# Altium PCB PCB_ESP32.PcbDoc (part 2 of 3)
Units mil, origin at the board's own origin, x right, y up, seen from the top; angles counter-clockwise.
Board outline 2700 x 1000 mil, 4 copper layers (L1, L2, L3, L4), stack 61.583 mil thick; 64 components, 73 nets, 299 pads, 161 vias.
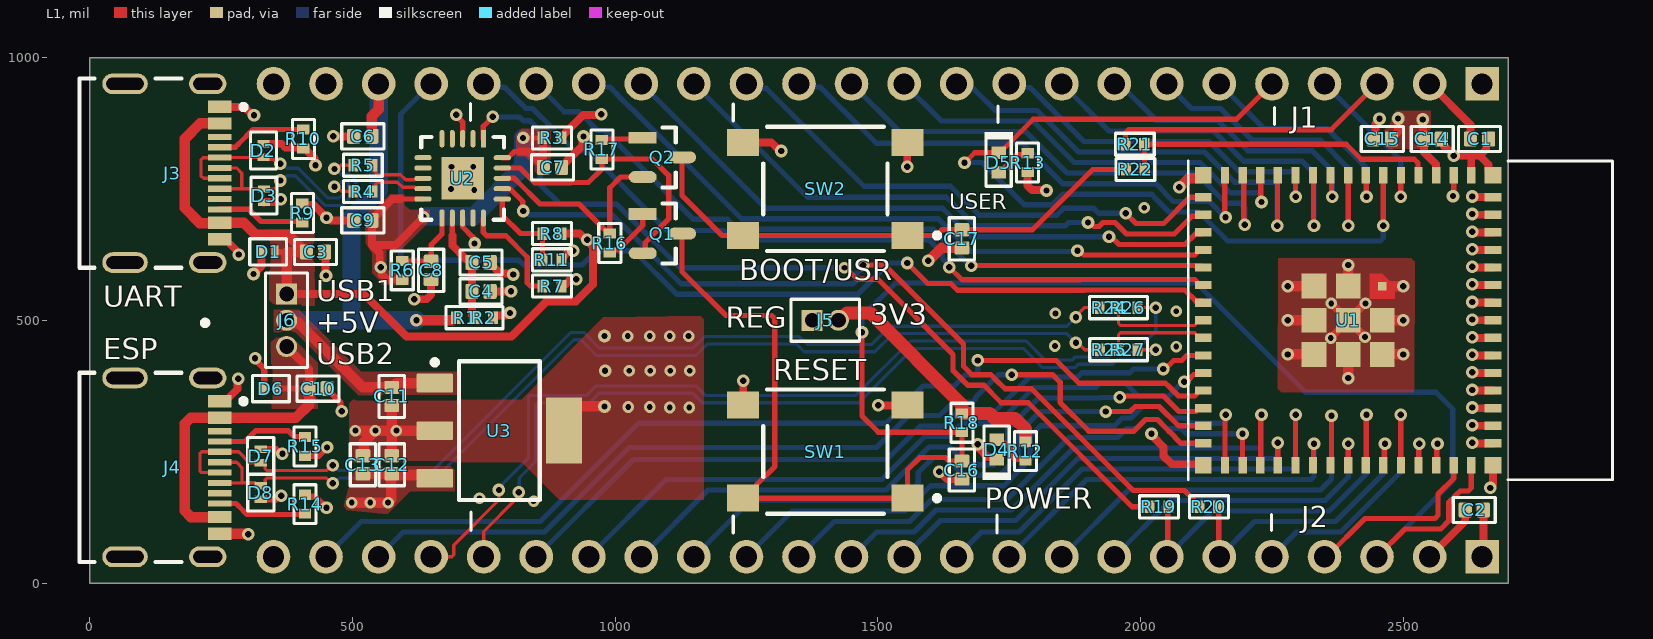
[diagram p0: L1 view]

## Part data (continued)
R4 R5 R21 R22: library part RC0402FR-0727RL, "RES 27 OHM 1% 1/16W 0402", Case Code (Imperial)=0402, Case Code (Metric)=1005, LCSC Part Number=C138021, Manufacturer="Yageo Group", Max Operating Temperature=155°C, Max Power Dissipation=63mW, Min Operating Temperature=-55°C, Power Dissipation=62.5mW, Supplier Part Number=YAG3086DKR-ND, Temperature Coefficient=100ppm/°C, Tolerance=1%, Voltage Rating=50V, Case/Package=0402, Category="Chip SMD Resistors", China RoHS=Non-Compliant, ComponentLink1Description=https://datasheet.octopart.com:443/RC0402FR-0727RL-Yageo-datasheet-175887523.pdf?src-supplier=Newark, ComponentLink1URL=https://datasheet.octopart.com:443/RC0402FR-0727RL-Yageo-datasheet-175887523.pdf?src-supplier=Newark, ComponentLink2Description=https://datasheet.octopart.com:443/RC0402FR-0727RL-Yageo-datasheet-8324527.pdf?src-supplier=Newark, ComponentLink2URL=https://datasheet.octopart.com:443/RC0402FR-0727RL-Yageo-datasheet-8324527.pdf?src-supplier=Newark, ComponentLink3Description=https://datasheet.octopart.com:443/RC0402FR-0727RL-Yageo-datasheet-103092701.pdf?src-supplier=Upverter, ComponentLink3URL=https://datasheet.octopart.com:443/RC0402FR-0727RL-Yageo-datasheet-103092701.pdf?src-supplier=Upverter, ComponentLink4Description=https://datasheet.octopart.com:443/RC0402FR-0727RL-Yageo-datasheet-10408619.pdf?src-supplier=element14+APAC, ComponentLink4URL=https://datasheet.octopart.com:443/RC0402FR-0727RL-Yageo-datasheet-10408619.pdf?src-supplier=element14+APAC, ComponentLink5Description=https://datasheet.octopart.com:443/RC0402FR-0727RL-Yageo-datasheet-62067350.pdf?src-supplier=element14+APAC, ComponentLink5URL=https://datasheet.octopart.com:443/RC0402FR-0727RL-Yageo-datasheet-62067350.pdf?src-supplier=element14+APAC, ComponentLink6Description=https://datasheet.octopart.com:443/RC0402FR-0727RL-Yageo-datasheet-175423674.pdf?src-supplier=SOS+electronic, ComponentLink6URL=https://datasheet.octopart.com:443/RC0402FR-0727RL-Yageo-datasheet-175423674.pdf?src-supplier=SOS+electronic, ComponentLink7Description=https://datasheet.octopart.com:443/RC0402FR-0727RL-Yageo-datasheet-8329306.pdf?src-supplier=SOS+electronic, ComponentLink7URL=https://datasheet.octopart.com:443/RC0402FR-0727RL-Yageo-datasheet-8329306.pdf?src-supplier=SOS+electronic, ComponentLink8Description=https://datasheet.octopart.com:443/RC0402FR-0727RL-Yageo-datasheet-164759695.pdf?src-supplier=Future+Electronics, ComponentLink8URL=https://datasheet.octopart.com:443/RC0402FR-0727RL-Yageo-datasheet-164759695.pdf?src-supplier=Future+Electronics, ComponentLink9Description=https://datasheet.octopart.com:443/RC0402FR-0727RL-Yageo-datasheet-137700087.pdf?src-supplier=Future+Electronics, ComponentLink9URL=https://datasheet.octopart.com:443/RC0402FR-0727RL-Yageo-datasheet-137700087.pdf?src-supplier=Future+Electronics, ComponentLink10Description=https://datasheet.octopart.com:443/RC0402FR-0727RL-Yageo-datasheet-12531192.pdf?src-supplier=Future+Electronics, ComponentLink10URL=https://datasheet.octopart.com:443/RC0402FR-0727RL-Yageo-datasheet-12531192.pdf?src-supplier=Future+Electronics, ComponentLink11Description=https://datasheet.octopart.com:443/RC0402FR-0727RL-Yageo-datasheet-148775077.pdf?src-supplier=TME, ComponentLink11URL=https://datasheet.octopart.com:443/RC0402FR-0727RL-Yageo-datasheet-148775077.pdf?src-supplier=TME, ComponentLink12Description=https://datasheet.octopart.com/RC0402FR-0727RL-Yageo-datasheet-73766026.pdf, ComponentLink12URL=https://datasheet.octopart.com/RC0402FR-0727RL-Yageo-datasheet-73766026.pdf, ComponentLink13Description=http://sigma.octopart.com:80/rohs_statement/Yageo-company-2.pdf?src-supplier=Compliance+Statements, ComponentLink13URL=http://sigma.octopart.com:80/rohs_statement/Yageo-company-2.pdf?src-supplier=Compliance+Statements, ComponentLink14Description=http://sigma.octopart.com:80/conflict_mineral_statement/Yageo-company-3.pdf?src-supplier=Compliance+Statements, ComponentLink14URL=http://sigma.octopart.com:80/conflict_mineral_statement/Yageo-company-3.pdf?src-supplier=Compliance+Statements, Composition="Thick Film", Depth=500µm, Features="Moisture Resistant", Height=350µm, Lead Free="Lead Free", Length=1mm, Lifecycle Status=Production, Manufacturer Part Number=RC0402FR-0727RL, Military Standard=Not, Mounting Technology="Surface Mount", Number of Terminals=2, Number of Terminations=2, Pins=2, Power Rating=63mW, Pricing="1=0.1, 10=0.007, 25=0.0068, 50=0.0062, 100=0.0051, 250=0.00308 (USD)", REACH SVHC=Yes, RoHS=Compliant, Schedule B="8533210045, 8533210045|8533210045, 8533210045|8533210045|8533210045, 8533210045|8533210045|8533210045|8533210045", Stock=336674, Supplier=DigiKey, Termination=SMD/SMT, Voltage Rating (AC)=50V, Voltage Rating (DC)=50V, Weight=652.039032µg, Width=500µm, Working Voltage=50V
R7 R11 R16 R17 R18: library part RC0402FR-0710KL, "RES 10K OHM 1% 1/16W 0402", Case Code (Imperial)=0402, LCSC Part Number=C60490, Manufacturer="Yageo Group", Max Operating Temperature=155°C, Min Operating Temperature=-55°C, Power Dissipation=62.5mW, Power Rating=63mW, Supplier Part Number=311-10.0KLRCT-ND, Temperature Coefficient=100ppm/°C, Tolerance=1%, Voltage Rating=50V, Case Code (Metric)=0402, Case/Package=0402, Category="Chip SMD Resistors", China RoHS=Non-Compliant, ComponentLink1Description=https://datasheet.octopart.com:443/RC0402FR-0710KL-Yageo-datasheet-175887523.pdf?src-supplier=Newark, ComponentLink1URL=https://datasheet.octopart.com:443/RC0402FR-0710KL-Yageo-datasheet-175887523.pdf?src-supplier=Newark, ComponentLink2Description=https://datasheet.octopart.com:443/RC0402FR-0710KL-Yageo-datasheet-12531192.pdf?src-supplier=Newark, ComponentLink2URL=https://datasheet.octopart.com:443/RC0402FR-0710KL-Yageo-datasheet-12531192.pdf?src-supplier=Newark, ComponentLink3Description=https://datasheet.octopart.com:443/RC0402FR-0710KL-Yageo-datasheet-8324527.pdf?src-supplier=Newark, ComponentLink3URL=https://datasheet.octopart.com:443/RC0402FR-0710KL-Yageo-datasheet-8324527.pdf?src-supplier=Newark, ComponentLink4Description=https://datasheet.octopart.com:443/RC0402FR-0710KL-Yageo-datasheet-10408619.pdf?src-supplier=element14+APAC, ComponentLink4URL=https://datasheet.octopart.com:443/RC0402FR-0710KL-Yageo-datasheet-10408619.pdf?src-supplier=element14+APAC, ComponentLink5Description=https://datasheet.octopart.com:443/RC0402FR-0710KL-Yageo-datasheet-62067350.pdf?src-supplier=element14+APAC, ComponentLink5URL=https://datasheet.octopart.com:443/RC0402FR-0710KL-Yageo-datasheet-62067350.pdf?src-supplier=element14+APAC, ComponentLink6Description=https://datasheet.octopart.com:443/RC0402FR-0710KL-Yageo-datasheet-21426659.pdf?src-supplier=element14+APAC, ComponentLink6URL=https://datasheet.octopart.com:443/RC0402FR-0710KL-Yageo-datasheet-21426659.pdf?src-supplier=element14+APAC, ComponentLink7Description=https://datasheet.octopart.com:443/RC0402FR-0710KL-Yageo-datasheet-164759695.pdf?src-supplier=Upverter, ComponentLink7URL=https://datasheet.octopart.com:443/RC0402FR-0710KL-Yageo-datasheet-164759695.pdf?src-supplier=Upverter, ComponentLink8Description=https://datasheet.octopart.com:443/RC0402FR-0710KL-Yageo-datasheet-103092701.pdf?src-supplier=Upverter, ComponentLink8URL=https://datasheet.octopart.com:443/RC0402FR-0710KL-Yageo-datasheet-103092701.pdf?src-supplier=Upverter, ComponentLink9Description=https://sigma.octopart.com:443/138820526/technical_drawing/Yageo-RC0402FR-0710KL.pdf?src-supplier=Upverter, ComponentLink9URL=https://sigma.octopart.com:443/138820526/technical_drawing/Yageo-RC0402FR-0710KL.pdf?src-supplier=Upverter, ComponentLink10Description=https://datasheet.octopart.com:443/RC0402FR-0710KL-Yageo-datasheet-98239111.pdf?src-supplier=Upverter, ComponentLink10URL=https://datasheet.octopart.com:443/RC0402FR-0710KL-Yageo-datasheet-98239111.pdf?src-supplier=Upverter, ComponentLink11Description=https://datasheet.octopart.com:443/RC0402FR-0710KL-Yageo-datasheet-68298067.pdf?src-supplier=Upverter, ComponentLink11URL=https://datasheet.octopart.com:443/RC0402FR-0710KL-Yageo-datasheet-68298067.pdf?src-supplier=Upverter, ComponentLink12Description=https://datasheet.octopart.com:443/RC0402FR-0710KL-Yageo-datasheet-68297981.pdf?src-supplier=Upverter, ComponentLink12URL=https://datasheet.octopart.com:443/RC0402FR-0710KL-Yageo-datasheet-68297981.pdf?src-supplier=Upverter, ComponentLink13Description=https://datasheet.octopart.com:443/RC0402FR-0710KL-Yageo-datasheet-141435361.pdf?src-supplier=Upverter, ComponentLink13URL=https://datasheet.octopart.com:443/RC0402FR-0710KL-Yageo-datasheet-141435361.pdf?src-supplier=Upverter, ComponentLink14Description=https://datasheet.octopart.com:443/RC0402FR-0710KL-Yageo-datasheet-12509768.pdf?src-supplier=Upverter, ComponentLink14URL=https://datasheet.octopart.com:443/RC0402FR-0710KL-Yageo-datasheet-12509768.pdf?src-supplier=Upverter, ComponentLink15Description=https://datasheet.octopart.com:443/RC0402FR-0710KL-Yageo-datasheet-8329306.pdf?src-supplier=element14, ComponentLink15URL=https://datasheet.octopart.com:443/RC0402FR-0710KL-Yageo-datasheet-8329306.pdf?src-supplier=element14, ComponentLink16Description=https://datasheet.octopart.com:443/RC0402FR-0710KL-Yageo-datasheet-505231.pdf?src-supplier=element14, ComponentLink16URL=https://datasheet.octopart.com:443/RC0402FR-0710KL-Yageo-datasheet-505231.pdf?src-supplier=element14, ComponentLink17Description=https://datasheet.octopart.com:443/RC0402FR-0710KL-Yageo-datasheet-175423674.pdf?src-supplier=SOS+electronic, ComponentLink17URL=https://datasheet.octopart.com:443/RC0402FR-0710KL-Yageo-datasheet-175423674.pdf?src-supplier=SOS+electronic, ComponentLink18Description=https://datasheet.octopart.com:443/RC0402FR-0710KL-Yageo-datasheet-137700087.pdf?src-supplier=Future+Electronics, ComponentLink18URL=https://datasheet.octopart.com:443/RC0402FR-0710KL-Yageo-datasheet-137700087.pdf?src-supplier=Future+Electronics, ComponentLink19Description=https://datasheet.octopart.com:443/RC0402FR-0710KL-Yageo-datasheet-8324255.pdf?src-supplier=Future+Electronics, ComponentLink19URL=https://datasheet.octopart.com:443/RC0402FR-0710KL-Yageo-datasheet-8324255.pdf?src-supplier=Future+Electronics, ComponentLink20Description=https://datasheet.octopart.com:443/RC0402FR-0710KL-Yageo-datasheet-79472498.pdf?src-supplier=Megastar, ComponentLink20URL=https://datasheet.octopart.com:443/RC0402FR-0710KL-Yageo-datasheet-79472498.pdf?src-supplier=Megastar, ComponentLink21Description=https://datasheet.octopart.com/RC0402FR-0710KL-Yageo-datasheet-73766026.pdf, ComponentLink21URL=https://datasheet.octopart.com/RC0402FR-0710KL-Yageo-datasheet-73766026.pdf, ComponentLink22Description=http://sigma.octopart.com:80/rohs_statement/Yageo-company-2.pdf?src-supplier=Compliance+Statements, ComponentLink22URL=http://sigma.octopart.com:80/rohs_statement/Yageo-company-2.pdf?src-supplier=Compliance+Statements, ComponentLink23Description=http://sigma.octopart.com:80/conflict_mineral_statement/Yageo-company-3.pdf?src-supplier=Compliance+Statements, ComponentLink23URL=http://sigma.octopart.com:80/conflict_mineral_statement/Yageo-company-3.pdf?src-supplier=Compliance+Statements, Composition="Thick Film", Depth=500µm, Height=350µm, Lead Free="Lead Free", Lead Pitch=200µm, Length=1mm, Lifecycle Status=Production, Manufacturer Part Number=RC0402FR-0710KL, Military Standard=Not, Mounting Technology="Surface Mount", Number of Terminals=2, Number of Terminations=2, Packaging="Tape & Reel", Pins=2, Pricing="1=0.11, 10=0.011, 25=0.010, 50=0.0092, 100=0.0071, 250=0.00308, 10000=0.00286, 20000=0.00253, 30000=0.00237, 50000=0.0022, 70000=0.0021, 100000=0.002, 120000=0.00196, 240000=0.00182, 250000=0.00181 (USD)", REACH SVHC=Yes, RoHS=Compliant, Schedule B="8533210045, 8533210045|8533210045|8533210045|8533210045|8533210045|8533210045|8533210045|8533210045|8533210045|8533210045|8533210045|8533210045|8533210045|8533210045, 8533210045|8533210045|8533210045|8533210045|8533210045|8533210045|8533210045|8533210045|8533210045|8533210045|8533210045|8533210045|8533210045|8533210045|8533210045, 8533210045|8533210045|8533210045|8533210045|8533210045|8533210045|8533210045|8533210045|8533210045|8533210045|8533210045|8533210045|8533210045|8533210045|8533210045|8533210045", Stock=10693324, Supplier=DigiKey, Termination=SMD/SMT, Voltage Rating (DC)=50V, Width=500µm, Working Voltage=50V
R8: library part RC0402FR-074K7L, "RES 4.7K OHM 1% 1/16W 0402", Case Code (Imperial)=0402, Case Code (Metric)=1005, LCSC Part Number=C105871, Manufacturer="Yageo Group", Max Operating Temperature=155°C, Min Operating Temperature=-55°C, Power Dissipation=62.5mW, Power Rating=63mW, Supplier Part Number=311-4.7KLRCT-ND, Temperature Coefficient=100ppm/°C, Tolerance=1%, Voltage Rating=50V, Case/Package=0402, Category="Chip SMD Resistors", China RoHS=Non-Compliant, ComponentLink1Description=https://datasheet.octopart.com:443/RC0402FR-074K7L-Yageo-datasheet-175887523.pdf?src-supplier=IHS, ComponentLink1URL=https://datasheet.octopart.com:443/RC0402FR-074K7L-Yageo-datasheet-175887523.pdf?src-supplier=IHS, ComponentLink2Description=https://datasheet.octopart.com:443/RC0402FR-074K7L-Yageo-datasheet-103092701.pdf?src-supplier=Upverter, ComponentLink2URL=https://datasheet.octopart.com:443/RC0402FR-074K7L-Yageo-datasheet-103092701.pdf?src-supplier=Upverter, ComponentLink3Description=https://datasheet.octopart.com:443/RC0402FR-074K7L-Yageo-datasheet-98239111.pdf?src-supplier=Upverter, ComponentLink3URL=https://datasheet.octopart.com:443/RC0402FR-074K7L-Yageo-datasheet-98239111.pdf?src-supplier=Upverter, ComponentLink4Description=https://datasheet.octopart.com:443/RC0402FR-074K7L-Yageo-datasheet-10408619.pdf?src-supplier=element14+APAC, ComponentLink4URL=https://datasheet.octopart.com:443/RC0402FR-074K7L-Yageo-datasheet-10408619.pdf?src-supplier=element14+APAC, ComponentLink5Description=https://datasheet.octopart.com:443/RC0402FR-074K7L-Yageo-datasheet-13691069.pdf?src-supplier=element14+APAC, ComponentLink5URL=https://datasheet.octopart.com:443/RC0402FR-074K7L-Yageo-datasheet-13691069.pdf?src-supplier=element14+APAC, ComponentLink6Description=https://datasheet.octopart.com:443/RC0402FR-074K7L-Yageo-datasheet-12531192.pdf?src-supplier=Newark, ComponentLink6URL=https://datasheet.octopart.com:443/RC0402FR-074K7L-Yageo-datasheet-12531192.pdf?src-supplier=Newark, ComponentLink7Description=https://datasheet.octopart.com:443/RC0402FR-074K7L-Yageo-datasheet-8324527.pdf?src-supplier=Newark, ComponentLink7URL=https://datasheet.octopart.com:443/RC0402FR-074K7L-Yageo-datasheet-8324527.pdf?src-supplier=Newark, ComponentLink8Description=https://datasheet.octopart.com:443/RC0402FR-074K7L-Yageo-datasheet-62067350.pdf?src-supplier=Farnell, ComponentLink8URL=https://datasheet.octopart.com:443/RC0402FR-074K7L-Yageo-datasheet-62067350.pdf?src-supplier=Farnell, ComponentLink9Description=https://datasheet.octopart.com:443/RC0402FR-074K7L-Yageo-datasheet-8329306.pdf?src-supplier=element14, ComponentLink9URL=https://datasheet.octopart.com:443/RC0402FR-074K7L-Yageo-datasheet-8329306.pdf?src-supplier=element14, ComponentLink10Description=https://datasheet.octopart.com:443/RC0402FR-074K7L-Yageo-datasheet-175423674.pdf?src-supplier=SOS+electronic, ComponentLink10URL=https://datasheet.octopart.com:443/RC0402FR-074K7L-Yageo-datasheet-175423674.pdf?src-supplier=SOS+electronic, ComponentLink11Description=https://datasheet.octopart.com:443/RC0402FR-074K7L-Yageo-datasheet-164759695.pdf?src-supplier=Future+Electronics, ComponentLink11URL=https://datasheet.octopart.com:443/RC0402FR-074K7L-Yageo-datasheet-164759695.pdf?src-supplier=Future+Electronics, ComponentLink12Description=https://datasheet.octopart.com:443/RC0402FR-074K7L-Yageo-datasheet-137700087.pdf?src-supplier=Future+Electronics, ComponentLink12URL=https://datasheet.octopart.com:443/RC0402FR-074K7L-Yageo-datasheet-137700087.pdf?src-supplier=Future+Electronics, ComponentLink13Description=https://datasheet.octopart.com:443/RC0402FR-074K7L-Yageo-datasheet-79472498.pdf?src-supplier=Megastar, ComponentLink13URL=https://datasheet.octopart.com:443/RC0402FR-074K7L-Yageo-datasheet-79472498.pdf?src-supplier=Megastar, ComponentLink14Description=https://datasheet.octopart.com/RC0402FR-074K7L-Yageo-datasheet-73766026.pdf, ComponentLink14URL=https://datasheet.octopart.com/RC0402FR-074K7L-Yageo-datasheet-73766026.pdf, ComponentLink15Description=http://sigma.octopart.com:80/rohs_statement/Yageo-company-2.pdf?src-supplier=Compliance+Statements, ComponentLink15URL=http://sigma.octopart.com:80/rohs_statement/Yageo-company-2.pdf?src-supplier=Compliance+Statements, ComponentLink16Description=http://sigma.octopart.com:80/conflict_mineral_statement/Yageo-company-3.pdf?src-supplier=Compliance+Statements, ComponentLink16URL=http://sigma.octopart.com:80/conflict_mineral_statement/Yageo-company-3.pdf?src-supplier=Compliance+Statements, Composition="Thick Film", Depth=500µm, Height=350µm, Lead Free="Lead Free", Length=1mm, Lifecycle Status=Production, Manufacturer Part Number=RC0402FR-074K7L, Military Standard=Not, Mounting Technology="Surface Mount", Number of Terminals=2, Packaging="Tape & Reel", Pins=2, Pricing="1=0.1, 10=0.02, 25=0.014, 50=0.0112, 100=0.009, 250=0.00688, 500=0.00566, 1000=0.00474, 5000=0.00328 (USD)", REACH SVHC=Yes, RoHS=Compliant, Schedule B="8533210045, 8533210045|8533210045, 8533210045|8533210045|8533210045, 8533210045|8533210045|8533210045|8533210045", Stock=2042199, Supplier=DigiKey, Termination=SMD/SMT, Voltage Rating (AC)=50V, Voltage Rating (DC)=50V, Width=500µm, Working Voltage=50V
R9 R10 R14 R15: library part RC0402FR-07510KL, "RES 5.1K OHM 1% 1/16W 0402", Case Code (Imperial)=0402, LCSC Part Number=C105872, Manufacturer="Yageo Group", Max Operating Temperature=155°C, Max Power Dissipation=63mW, Min Operating Temperature=-55°C, Power Dissipation=62.5mW, Supplier Part Number=311-510KLRCT-ND, Temperature Coefficient=100ppm/°C, Tolerance=1%, Voltage Rating=50V, Case/Package=0402, Category="Chip SMD Resistors", China RoHS=Non-Compliant, ComponentLink1Description=https://datasheet.octopart.com:443/RC0402FR-07510KL-Yageo-datasheet-175887523.pdf?src-supplier=Newark, ComponentLink1URL=https://datasheet.octopart.com:443/RC0402FR-07510KL-Yageo-datasheet-175887523.pdf?src-supplier=Newark, ComponentLink2Description=https://datasheet.octopart.com:443/RC0402FR-07510KL-Yageo-datasheet-8324527.pdf?src-supplier=Newark, ComponentLink2URL=https://datasheet.octopart.com:443/RC0402FR-07510KL-Yageo-datasheet-8324527.pdf?src-supplier=Newark, ComponentLink3Description=https://datasheet.octopart.com:443/RC0402FR-07510KL-Yageo-datasheet-103092701.pdf?src-supplier=Upverter, ComponentLink3URL=https://datasheet.octopart.com:443/RC0402FR-07510KL-Yageo-datasheet-103092701.pdf?src-supplier=Upverter, ComponentLink4Description=https://datasheet.octopart.com:443/RC0402FR-07510KL-Yageo-datasheet-10408619.pdf?src-supplier=element14+APAC, ComponentLink4URL=https://datasheet.octopart.com:443/RC0402FR-07510KL-Yageo-datasheet-10408619.pdf?src-supplier=element14+APAC, ComponentLink5Description=https://datasheet.octopart.com:443/RC0402FR-07510KL-Yageo-datasheet-62067350.pdf?src-supplier=element14+APAC, ComponentLink5URL=https://datasheet.octopart.com:443/RC0402FR-07510KL-Yageo-datasheet-62067350.pdf?src-supplier=element14+APAC, ComponentLink6Description=https://datasheet.octopart.com:443/RC0402FR-07510KL-Yageo-datasheet-164759695.pdf?src-supplier=Future+Electronics, ComponentLink6URL=https://datasheet.octopart.com:443/RC0402FR-07510KL-Yageo-datasheet-164759695.pdf?src-supplier=Future+Electronics, ComponentLink7Description=https://datasheet.octopart.com:443/RC0402FR-07510KL-Yageo-datasheet-137700087.pdf?src-supplier=Future+Electronics, ComponentLink7URL=https://datasheet.octopart.com:443/RC0402FR-07510KL-Yageo-datasheet-137700087.pdf?src-supplier=Future+Electronics, ComponentLink8Description=https://datasheet.octopart.com:443/RC0402FR-07510KL-Yageo-datasheet-12531192.pdf?src-supplier=Future+Electronics, ComponentLink8URL=https://datasheet.octopart.com:443/RC0402FR-07510KL-Yageo-datasheet-12531192.pdf?src-supplier=Future+Electronics, ComponentLink9Description=https://datasheet.octopart.com:443/RC0402FR-07510KL-Yageo-datasheet-148775077.pdf?src-supplier=TME, ComponentLink9URL=https://datasheet.octopart.com:443/RC0402FR-07510KL-Yageo-datasheet-148775077.pdf?src-supplier=TME, ComponentLink10Description=https://datasheet.octopart.com/RC0402FR-07510KL-Yageo-datasheet-73766026.pdf, ComponentLink10URL=https://datasheet.octopart.com/RC0402FR-07510KL-Yageo-datasheet-73766026.pdf, ComponentLink11Description=http://sigma.octopart.com:80/rohs_statement/Yageo-company-2.pdf?src-supplier=Compliance+Statements, ComponentLink11URL=http://sigma.octopart.com:80/rohs_statement/Yageo-company-2.pdf?src-supplier=Compliance+Statements, ComponentLink12Description=http://sigma.octopart.com:80/conflict_mineral_statement/Yageo-company-3.pdf?src-supplier=Compliance+Statements, ComponentLink12URL=http://sigma.octopart.com:80/conflict_mineral_statement/Yageo-company-3.pdf?src-supplier=Compliance+Statements, Composition="Thick Film", Depth=500µm, Features="Moisture Resistant", Height=350µm, Lead Free="Lead Free", Length=1mm, Lifecycle Status=Production, Manufacturer Part Number=RC0402FR-07510KL, Military Standard=Not, Mounting Technology="Surface Mount", Number of Terminals=2, Number of Terminations=2, Packaging="Cut Tape", Pins=2, Power Rating=63mW, Pricing="1=0.1, 10=0.009, 25=0.0076, 50=0.0062, 100=0.0041, 250=0.00328 (USD)", REACH SVHC=Yes, RoHS=Compliant, Schedule B="8533210045, 8533210045|8533210045|8533210045|8533210045|8533210045", Stock=81482, Supplier=DigiKey, Termination=SMD/SMT, Voltage Rating (DC)=50V, Width=500µm, Working Voltage=50V
R12 R13: library part RC0402JR-071KL, "RES 1K OHM 5% 1/16W 0402", Case Code (Imperial)=0402, LCSC Part Number=C105637, Manufacturer="Yageo Group", Max Operating Temperature=155°C, Max Power Dissipation=63mW, Min Operating Temperature=-55°C, Power Dissipation=62.5mW, Supplier Part Number=311-1.0KJRCT-ND, Temperature Coefficient=100ppm/°C, Tolerance=5%, Voltage Rating=50V, Case/Package=0402, Category="Chip SMD Resistors", China RoHS=Non-Compliant, ComponentLink1Description=https://datasheet.octopart.com:443/RC0402JR-071KL-Yageo-datasheet-175887523.pdf?src-supplier=Farnell, ComponentLink1URL=https://datasheet.octopart.com:443/RC0402JR-071KL-Yageo-datasheet-175887523.pdf?src-supplier=Farnell, ComponentLink2Description=https://datasheet.octopart.com:443/RC0402JR-071KL-Yageo-datasheet-8324527.pdf?src-supplier=Farnell, ComponentLink2URL=https://datasheet.octopart.com:443/RC0402JR-071KL-Yageo-datasheet-8324527.pdf?src-supplier=Farnell, ComponentLink3Description=https://datasheet.octopart.com:443/RC0402JR-071KL-Yageo-datasheet-10408619.pdf?src-supplier=Newark, ComponentLink3URL=https://datasheet.octopart.com:443/RC0402JR-071KL-Yageo-datasheet-10408619.pdf?src-supplier=Newark, ComponentLink4Description=https://datasheet.octopart.com:443/RC0402JR-071KL-Yageo-datasheet-505231.pdf?src-supplier=Newark, ComponentLink4URL=https://datasheet.octopart.com:443/RC0402JR-071KL-Yageo-datasheet-505231.pdf?src-supplier=Newark, ComponentLink5Description=https://datasheet.octopart.com:443/RC0402JR-071KL-Yageo-datasheet-79472498.pdf?src-supplier=Upverter, ComponentLink5URL=https://datasheet.octopart.com:443/RC0402JR-071KL-Yageo-datasheet-79472498.pdf?src-supplier=Upverter, ComponentLink6Description=https://datasheet.octopart.com:443/RC0402JR-071KL-Yageo-datasheet-44585784.pdf?src-supplier=Upverter, ComponentLink6URL=https://datasheet.octopart.com:443/RC0402JR-071KL-Yageo-datasheet-44585784.pdf?src-supplier=Upverter, ComponentLink7Description=https://datasheet.octopart.com:443/RC0402JR-071KL-Yageo-datasheet-62067350.pdf?src-supplier=element14+APAC, ComponentLink7URL=https://datasheet.octopart.com:443/RC0402JR-071KL-Yageo-datasheet-62067350.pdf?src-supplier=element14+APAC, ComponentLink8Description=https://datasheet.octopart.com:443/RC0402JR-071KL-Yageo-datasheet-148775077.pdf?src-supplier=JRH+Electronics, ComponentLink8URL=https://datasheet.octopart.com:443/RC0402JR-071KL-Yageo-datasheet-148775077.pdf?src-supplier=JRH+Electronics, ComponentLink9Description=https://datasheet.octopart.com:443/RC0402JR-071KL-Yageo-datasheet-12531192.pdf?src-supplier=Seeed+Studio, ComponentLink9URL=https://datasheet.octopart.com:443/RC0402JR-071KL-Yageo-datasheet-12531192.pdf?src-supplier=Seeed+Studio, ComponentLink10Description=https://datasheet.octopart.com:443/RC0402JR-071KL-Yageo-datasheet-164759695.pdf?src-supplier=Future+Electronics, ComponentLink10URL=https://datasheet.octopart.com:443/RC0402JR-071KL-Yageo-datasheet-164759695.pdf?src-supplier=Future+Electronics, ComponentLink11Description=https://datasheet.octopart.com:443/RC0402JR-071KL-Yageo-datasheet-137700087.pdf?src-supplier=Future+Electronics, ComponentLink11URL=https://datasheet.octopart.com:443/RC0402JR-071KL-Yageo-datasheet-137700087.pdf?src-supplier=Future+Electronics, ComponentLink12Description=https://datasheet.octopart.com/RC0402JR-071KL-Yageo-datasheet-73766026.pdf, ComponentLink12URL=https://datasheet.octopart.com/RC0402JR-071KL-Yageo-datasheet-73766026.pdf, ComponentLink13Description=https://datasheet.octopart.com:443/RC0402JR-071KL-Yageo-datasheet-8329306.pdf?src-supplier=element14, ComponentLink13URL=https://datasheet.octopart.com:443/RC0402JR-071KL-Yageo-datasheet-8329306.pdf?src-supplier=element14, ComponentLink14Description=http://sigma.octopart.com:80/rohs_statement/Yageo-company-2.pdf?src-supplier=Compliance+Statements, ComponentLink14URL=http://sigma.octopart.com:80/rohs_statement/Yageo-company-2.pdf?src-supplier=Compliance+Statements, ComponentLink15Description=http://sigma.octopart.com:80/conflict_mineral_statement/Yageo-company-3.pdf?src-supplier=Compliance+Statements, ComponentLink15URL=http://sigma.octopart.com:80/conflict_mineral_statement/Yageo-company-3.pdf?src-supplier=Compliance+Statements, Composition="Thick Film", Depth=500µm, Features="Moisture Resistant", Height=350µm, Lead Free="Lead Free", Length=1mm, Lifecycle Status=Production, Manufacturer Part Number=RC0402JR-071KL, Military Standard=Not, Mounting Technology="Surface Mount", Number of Terminals=2, Number of Terminations=2, Packaging="Tape & Reel", Pins=2, Power Rating=62.5mW, Pricing="1=0.1, 10=0.006, 25=0.0052, 50=0.004, 100=0.0036, 250=0.00284 (USD)", REACH SVHC=Yes, RoHS=Compliant, Schedule B="8533210045, 8533210045|8533210045, 8533210045|8533210045|8533210045, 8533210045|8533210045|8533210045|8533210045", Stock=6533264, Supplier=DigiKey, Termination=SMD/SMT, Voltage Rating (AC)=50V, Voltage Rating (DC)=50V, Width=500µm, Working Voltage=50V
SW1 SW2: library part PTS645SM43SMTR92LFS, "SWITCH TACTILE SPST-NO 0.05A 12V", Case/Package=SMD/SMT, Color=Black, Contact Current Rating=50mA, Contact Resistance=100mΩ, Insulation Resistance=100GΩ, LCSC Part Number=C221877, Manufacturer="C&K Components", Max Operating Temperature=60°C, Max Voltage Rating (DC)=12V, Min Operating Temperature=-20°C, Operating Force=1.57N, Supplier Part Number=CKN9112CT-ND, Actuator Length=850µm, Actuator Material="Nylon, Polyamide", Category="Tactile Switches", ComponentLink1Description=https://datasheet.octopart.com:443/PTS645SM43SMTR92LFS-C%26K-Components-datasheet-169841344.pdf?src-supplier=Newark, ComponentLink1URL=https://datasheet.octopart.com:443/PTS645SM43SMTR92LFS-C%26K-Components-datasheet-169841344.pdf?src-supplier=Newark, ComponentLink2Description=https://datasheet.octopart.com:443/PTS645SM43SMTR92LFS-C%26K-Components-datasheet-41191814.pdf?src-supplier=Newark, ComponentLink2URL=https://datasheet.octopart.com:443/PTS645SM43SMTR92LFS-C%26K-Components-datasheet-41191814.pdf?src-supplier=Newark, ComponentLink3Description=https://datasheet.octopart.com:443/PTS645SM43SMTR92LFS-C%26K-Components-datasheet-67873720.pdf?src-supplier=Upverter, ComponentLink3URL=https://datasheet.octopart.com:443/PTS645SM43SMTR92LFS-C%26K-Components-datasheet-67873720.pdf?src-supplier=Upverter, ComponentLink4Description=https://datasheet.octopart.com:443/PTS645SM43SMTR92-LFS-C%26K-Components-datasheet-39117004.pdf?src-supplier=Upverter, ComponentLink4URL=https://datasheet.octopart.com:443/PTS645SM43SMTR92-LFS-C%26K-Components-datasheet-39117004.pdf?src-supplier=Upverter, ComponentLink5Description=https://datasheet.octopart.com:443/PTS645SM43SMTR92LFS-C%26K-Components-datasheet-165782998.pdf?src-supplier=Farnell, ComponentLink5URL=https://datasheet.octopart.com:443/PTS645SM43SMTR92LFS-C%26K-Components-datasheet-165782998.pdf?src-supplier=Farnell, ComponentLink6Description=https://datasheet.octopart.com:443/PTS645SM43SMTR92LFS-C%26K-Components-datasheet-110647872.pdf?src-supplier=TME, ComponentLink6URL=https://datasheet.octopart.com:443/PTS645SM43SMTR92LFS-C%26K-Components-datasheet-110647872.pdf?src-supplier=TME, ComponentLink7Description=https://datasheet.octopart.com:443/PTS645SM43SMTR92LFS-C%26K-Components-datasheet-24578962.pdf?src-supplier=Future+Electronics, ComponentLink7URL=https://datasheet.octopart.com:443/PTS645SM43SMTR92LFS-C%26K-Components-datasheet-24578962.pdf?src-supplier=Future+Electronics, ComponentLink8Description=https://datasheet.octopart.com:443/PTS645SM43SMTR92LFS-C%26K-Components-datasheet-138128951.pdf?src-supplier=Future+Electronics, ComponentLink8URL=https://datasheet.octopart.com:443/PTS645SM43SMTR92LFS-C%26K-Components-datasheet-138128951.pdf?src-supplier=Future+Electronics, ComponentLink9Description=https://datasheet.octopart.com:443/PTS645SM43SMTR92LFS-C%26K-Components-datasheet-62111174.pdf?src-supplier=Future+Electronics, ComponentLink9URL=https://datasheet.octopart.com:443/PTS645SM43SMTR92LFS-C%26K-Components-datasheet-62111174.pdf?src-supplier=Future+Electronics, ComponentLink10Description=https://datasheet.octopart.com:443/PTS645SM43SMTR92-LFS-C%26K-Components-datasheet-5331042.pdf?src-supplier=Future+Electronics, ComponentLink10URL=https://datasheet.octopart.com:443/PTS645SM43SMTR92-LFS-C%26K-Components-datasheet-5331042.pdf?src-supplier=Future+Electronics, ComponentLink11Description=https://datasheet.octopart.com:443/PTS645SM43SMTR92LFS-C%26K-Components-datasheet-62111384.pdf?src-supplier=Electro+Sonic, ComponentLink11URL=https://datasheet.octopart.com:443/PTS645SM43SMTR92LFS-C%26K-Components-datasheet-62111384.pdf?src-supplier=Electro+Sonic, ComponentLink12Description=https://datasheet.octopart.com:443/PTS645SM43SMTR92-LFS-C%26K-Components-datasheet-23707823.pdf?src-supplier=Electro+Sonic, ComponentLink12URL=https://datasheet.octopart.com:443/PTS645SM43SMTR92-LFS-C%26K-Components-datasheet-23707823.pdf?src-supplier=Electro+Sonic, ComponentLink13Description=https://datasheet.octopart.com:443/PTS645SM43SMTR92LFS-C%26K-Components-datasheet-44395798.pdf?src-supplier=Electro+Sonic, ComponentLink13URL=https://datasheet.octopart.com:443/PTS645SM43SMTR92LFS-C%26K-Components-datasheet-44395798.pdf?src-supplier=Electro+Sonic, ComponentLink14Description=http://sigma.octopart.com:80/reach_statement/ITT-company-18.pdf?src-supplier=Compliance+Statements, ComponentLink14URL=http://sigma.octopart.com:80/reach_statement/ITT-company-18.pdf?src-supplier=Compliance+Statements, Contact Material=Silver, Contact Plating=Silver, Current Rating=50mA, Depth=9mm, Electrical Life=100kcycles, Height=3.45mm, Illumination Type="Illuminated, Non-Illuminated", Lead Free="Lead Free", Length=6mm, Life (Cycles)=100kcycles, Lifecycle Status=Production, Manufacturer Package Identifier=PTS645SM43SMTR92LFS, Manufacturer Part Number=PTS645SM43SMTR92LFS, Max Current Rating=50mA, Mechanical Life=100kcycles, Mounting Technology="Surface Mount", Number of Positions=1, Orientation=Straight, Packaging="Cut Tape (CT)", Pricing="1=0.32, 10=0.275, 25=0.2576, 100=0.2307, 250=0.2138, 500=0.20176 (USD)", REACH SVHC=Yes, RoHS=Compliant, Stock=99095, Supplier=DigiKey, Switch Function=Off-Mom, Termination="Gull Wing", Throw Configuration=SPST, Voltage Rating (DC)=12V
U1: library part "ESP32-S3-MINI-1-N8 (2)", "20.5dBm ESP32-S3FN8 Chip 2.4GHz SMD WiFi Modules ROHS", LCSC Part Number=C2913206, Manufacturer="Espressif Systems", Supplier Part Number=5407-ESP32-S3-MINI-1-N8CT-ND, Category="RF Transceiver Modules and Modems", ComponentLink1Description=https://datasheet.octopart.com:443/ESP32-S3-MINI-1-N8-Espressif-Systems-datasheet-188867343.pdf?src-supplier=TME, ComponentLink1URL=https://datasheet.octopart.com:443/ESP32-S3-MINI-1-N8-Espressif-Systems-datasheet-188867343.pdf?src-supplier=TME, ComponentLink2Description=https://datasheet.octopart.com:443/ESP32-S3-MINI-1-N8-Espressif-Systems-datasheet-165560562.pdf?src-supplier=TME, ComponentLink2URL=https://datasheet.octopart.com:443/ESP32-S3-MINI-1-N8-Espressif-Systems-datasheet-165560562.pdf?src-supplier=TME, ComponentLink3Description=https://datasheet.octopart.com:443/ESP32-S3-MINI-1-N8-Espressif-Systems-datasheet-165560559.pdf?src-supplier=TME, ComponentLink3URL=https://datasheet.octopart.com:443/ESP32-S3-MINI-1-N8-Espressif-Systems-datasheet-165560559.pdf?src-supplier=TME, Manufacturer Part Number=ESP32-S3-MINI-1-N8, Pricing="1=5.28, 10=4.566, 25=4.3196, 100=3.9802, 250=3.7768 (USD)", RoHS=Compliant, Stock=5442, Supplier=DigiKey
U2: "IC USB SERIAL FULL UART 20QFN", Ambient Temperature Range High=85°C, Case/Package=QFN, Clock Frequency=12.02MHz, LCSC Part Number=C132159, Manufacturer=FTDI, Max Supply Current=8.4mA, Max Supply Voltage=5.5V, Min Operating Temperature=-40°C, Min Supply Voltage=2.97V, Operating Supply Current=8mA, Operating Supply Voltage=5V, Supplier Part Number=768-1128-6-ND, Category="Interface ICs", ComponentLink1Description=https://datasheet.octopart.com:443/FT231XQ-R-FTDI-datasheet-182343132.pdf?src-supplier=IHS, ComponentLink1URL=https://datasheet.octopart.com:443/FT231XQ-R-FTDI-datasheet-182343132.pdf?src-supplier=IHS, ComponentLink2Description=https://datasheet.octopart.com:443/FT231XQ-R-FTDI-datasheet-11021087.pdf?src-supplier=ODG+(Origin+Data+Global), ComponentLink2URL=https://datasheet.octopart.com:443/FT231XQ-R-FTDI-datasheet-11021087.pdf?src-supplier=ODG+(Origin+Data+Global), ComponentLink3Description=https://datasheet.octopart.com:443/FT231XQ-R-FTDI-datasheet-28834672.pdf?src-supplier=SOS+electronic, ComponentLink3URL=https://datasheet.octopart.com:443/FT231XQ-R-FTDI-datasheet-28834672.pdf?src-supplier=SOS+electronic, ComponentLink4Description=https://datasheet.octopart.com:443/FT231XQ-R-FTDI-datasheet-68321328.pdf?src-supplier=TME, ComponentLink4URL=https://datasheet.octopart.com:443/FT231XQ-R-FTDI-datasheet-68321328.pdf?src-supplier=TME, ComponentLink5Description=https://datasheet.octopart.com:443/FT231XQ-R-FTDI-datasheet-134530624.pdf?src-supplier=SHENGYU+ELECTRONICS, ComponentLink5URL=https://datasheet.octopart.com:443/FT231XQ-R-FTDI-datasheet-134530624.pdf?src-supplier=SHENGYU+ELECTRONICS, Data Rate=12Mbps, Height=800µm, Height - Seated (Max)=800µm, Interface="UART, USB", Lead Free="Lead Free", Length=4mm, Lifecycle Status=Production, Manufacturer Part Number=FT231XQ-R, Max Operating Temperature=85°C, Mounting Technology="Surface Mount", Number of Channels=1, Number of Terminals=20, Pins=20, Pricing="1=2.34, 25=2.27, 100=2.2, 250=2, 500=1.82002, 1000=1.7625 (USD)", REACH SVHC=Yes, RoHS=Compliant, Supplier=DigiKey, Terminal Pitch=500µm, Weight=123.008581mg, Width=4mm
U3: library part TL1963A-33DCYR, "IC REG LIN 3.3V 1.5A SOT-223-4", Case/Package=SOT-223, Dropout Voltage=340mV, Input Bias Current=1mA, LCSC Part Number=C181262, Manufacturer="Texas Instruments", Manufacturer Lifecycle Status=ACTIVE, Max Operating Temperature=125°C, Max Output current=1.5A, Max Output Voltage=3.3V, Max Supply Voltage=20V, Min Current Limit=1.6A, Min Input Voltage=2.1V, Min Operating Temperature=-40°C, Supplier Part Number=296-24897-1-ND, Accuracy=3%, Category="LDO Voltage Regulators", ComponentLink1Description=https://datasheet.octopart.com:443/TL1963A-33DCYR-Texas-Instruments-datasheet-36835243.pdf?src-supplier=Texas+Instruments, ComponentLink1URL=https://datasheet.octopart.com:443/TL1963A-33DCYR-Texas-Instruments-datasheet-36835243.pdf?src-supplier=Texas+Instruments, ComponentLink2Description=https://octopart.com:443/opatz8j6/c1?t=LPeIxNi9VIYhm4btPFesztQZr4Jwx4TEC9AzYIUzidleAjnLaCDg6djcfYgtEMksBP0b_W3HSBBkjLtdrfUn_yKeYr90VnZnmxw6arzA67Vmvq8kZVG4O0e60ARL7pAIxCU2reMQf8TBoAelotyVd-WlnWm22AyI_CO01BS-AvkILhbkAVk9waJFLfX5A7FtpEh2ahsW7Cg7jbdiX5maXLx2SysLFBPbu5IM2MS4K_ALs9Dlm3jTemRu7569Czv_q8HC2t3XPXHLUqWVYjMucOH6e4xWDqPFckp9BF6dznZ9HiDuEJm79JbQylyrwXBE7XZoj7nRDedoSKcsoIL3ZlqmwmuQ2-ckibvkVswyS9YtYxnRTimSPVhGH0uCwb9IPo2vqTs&src-supplier=Texas+Instruments, ComponentLink2URL=https://octopart.com:443/opatz8j6/c1?t=LPeIxNi9VIYhm4btPFesztQZr4Jwx4TEC9AzYIUzidleAjnLaCDg6djcfYgtEMksBP0b_W3HSBBkjLtdrfUn_yKeYr90VnZnmxw6arzA67Vmvq8kZVG4O0e60ARL7pAIxCU2reMQf8TBoAelotyVd-WlnWm22AyI_CO01BS-AvkILhbkAVk9waJFLfX5A7FtpEh2ahsW7Cg7jbdiX5maXLx2SysLFBPbu5IM2MS4K_ALs9Dlm3jTemRu7569Czv_q8HC2t3XPXHLUqWVYjMucOH6e4xWDqPFckp9BF6dznZ9HiDuEJm79JbQylyrwXBE7XZoj7nRDedoSKcsoIL3ZlqmwmuQ2-ckibvkVswyS9YtYxnRTimSPVhGH0uCwb9IPo2vqTs&src-supplier=Texas+Instruments, ComponentLink3Description=https://datasheet.octopart.com:443/TL1963A-33DCYR-Texas-Instruments-datasheet-10255270.pdf?src-supplier=Texas+Instruments, ComponentLink3URL=https://datasheet.octopart.com:443/TL1963A-33DCYR-Texas-Instruments-datasheet-10255270.pdf?src-supplier=Texas+Instruments, ComponentLink4Description=https://sigma.octopart.com:443/49253063/technical_drawing/Texas-Instruments-TL1963A-33DCYR.pdf?src-supplier=Texas+Instruments, ComponentLink4URL=https://sigma.octopart.com:443/49253063/technical_drawing/Texas-Instruments-TL1963A-33DCYR.pdf?src-supplier=Texas+Instruments, ComponentLink5Description=https://datasheet.octopart.com:443/TL1963A-33DCYR-Texas-Instruments-datasheet-159117591.pdf?src-supplier=Augswan, ComponentLink5URL=https://datasheet.octopart.com:443/TL1963A-33DCYR-Texas-Instruments-datasheet-159117591.pdf?src-supplier=Augswan, ComponentLink6Description=https://datasheet.octopart.com:443/TL1963A-33DCYR-Texas-Instruments-datasheet-21820479.pdf?src-supplier=Newark, ComponentLink6URL=https://datasheet.octopart.com:443/TL1963A-33DCYR-Texas-Instruments-datasheet-21820479.pdf?src-supplier=Newark, ComponentLink7Description=https://datasheet.octopart.com:443/TL1963A-33DCYR-Texas-Instruments-datasheet-16079880.pdf?src-supplier=Farnell, ComponentLink7URL=https://datasheet.octopart.com:443/TL1963A-33DCYR-Texas-Instruments-datasheet-16079880.pdf?src-supplier=Farnell, ComponentLink8Description=https://datasheet.octopart.com:443/TL1963A-33DCYR-Texas-Instruments-datasheet-14171511.pdf?src-supplier=iiiC, ComponentLink8URL=https://datasheet.octopart.com:443/TL1963A-33DCYR-Texas-Instruments-datasheet-14171511.pdf?src-supplier=iiiC, ComponentLink9Description=http://sigma.octopart.com:80/conflict_mineral_statement/Texas-Instruments-company-63.pdf?src-supplier=Compliance+Statements, ComponentLink9URL=http://sigma.octopart.com:80/conflict_mineral_statement/Texas-Instruments-company-63.pdf?src-supplier=Compliance+Statements, ComponentLink10Description=http://sigma.octopart.com:80/reach_statement/Texas-Instruments-company-64.pdf?src-supplier=Compliance+Statements, ComponentLink10URL=http://sigma.octopart.com:80/reach_statement/Texas-Instruments-company-64.pdf?src-supplier=Compliance+Statements, Contact Plating=Tin, Height=1.8mm, Lead Free="Lead Free", Length=6.5mm, Lifecycle Status=Production, Manufacturer Part Number=TL1963A-33DCYR, Min Output Voltage=3.3V, Nominal Output Voltage=3.3V, Number of Outputs=1, Number of Regulators=1, Output Current=1.5A, Output Type=Fixed, Output Voltage=3.3V, Pins=4, Polarity=Positive, Pricing="1=3.13, 10=2.344, 25=2.1476, 100=1.9323, 250=1.82956, 500=1.76766, 1000=1.71669 (USD)", Quiescent Current=1mA, Radiation Hardening=No, REACH SVHC=No, RoHS=Compliant, Schedule B="8542390000, 8542390000|8542390000|8542390000|8542390000|8542390000", Stock=5375, Supplier=DigiKey, Thickness=1.6mm, Width=3.5mm

## Via types
v1: diameter 24, hole 12, L1 to L4, tented both sides, 126 vias
v2: diameter 22, hole 11, L1 to L4, tented both sides, 35 vias

## Nets (pads, with @x,y where several pads share a name; then routed paths per layer and width w, separated by ;. In a path a pad name is that pad's centre, name@x,y a point inside that pad or via, vN(x,y) a via of type N, cw(c..) or ccw(c..) an arc to the next point about the centre after c; other vN are vias at no path point)
+3V3: C1.2 C2.2 C14.2 C15.2 J1.2 J2.1 J5.2 R2.1 R3.1 R12.2 R13.2 R18.2 U1.3 | length 4477.2
  L1 w15: R2.1@767.91,505 767.91,507.17 770.06,509.31 787.17,509.31 792.88,509.31 797.56,514 v1(800,514) ; R3.1@897.91,847 900.06,849.15 900.06,851.31 939.5,890.75 972.75,890.75 v1(974,892) ; R13.2@1785,782.09 1785,780.44 1784.5,779.94 1784.5,756.5 1793.29,747.71 1820.29,747.71 v1(1821,747) ; C15.2@2477.28,845 2477.28,846.57 2490,859.29 v1(2490,884) ; v1(2537,882) 2537.36,881.64 C14.2@2537.36,845.36 ; C14.2@2537.72,845 2539.14,843.58 2539.14,819.68 2561.99,796.83 2561.99,775.96 U1.3@2562.36,775.59 ; J1.2@2550,950 2627.72,872.28 C1.2@2627.72,845 ; J2.1@2650,50 2652.28,52.28 C2.2@2652.28,139
  L1 w25: J5.2@1427.71,500 1441.77,514.06 1485.33,514.06 1660,339.39 R18.2@1660,322.91 1712.66,322.91 1722.57,313 1761.26,313 1781,293.26 R12.2@1781,268.91
  L1 w30: J5.2@1425,500 J5.2@1427.71,500
  L2 w15: v1(2490,884) 2491,883 2536,883 v1(2537,882)
  L2 w20: 2469.5,814.5 2597,687 2597,103 J2.1@2650,50
  L2 w35: v1(800,514) 817,514 864.59,561.59 864.59,829.99 925.11,890.5 972.5,890.5 v1(974,892) 1023.85,892 1168.85,747 1356,747 ; J5.2@1425,500 1424.04,500.96 1424.04,538.51 1356,606.55 1356,747 ; J1.2@2550,950 2544.45,944.45 2544.45,889.45 v1(2537,882) 2469.5,814.5 2019.64,814.5 1952.14,747 v1(1821,747) 1356,747
+3V3_FTDI: C7.2 C9.2 R3.2 R6.1 U2.10 U2.20 | length 856.2
  L1 w10: 592,731 592.37,730.63 U2.10@634.59,730.63 ; v1(825,847) R3.2@862.09,847
  L1 w10.01: U2.20@785.41,809.37 796.71,809.37 808.34,821 819,821
  L1 w15: 592,731 576.71,731 537.28,691.57 C9.2@537.28,690 537.28,643 ; R6.1@595,577.09 565.97,577.09 555.72,587.33 555.72,599.28 v1(554,601) 552.28,602.72 552.28,628.01 537.28,643 ; v2(636,697) 582,643 537.28,643 ; 819,821 835.29,821 C7.2@862.9,793.39 ; R3.2@862.09,847 862.9,846.18 C7.2@862.9,793.39 ; C7.2@863.72,791 862.9,791.81 C7.2@862.9,793.39
  L4 w35: v2@640.5,697.67 730.46,697.67 825,792.21 v1(825,847)
+3V3_REG: C12.2 C13.2 J5.1 U3.3 | length 1248.7
  L1 w20: v2(499,153) v2(534,153) v2(568,153) 568,153.54 574.08,159.62 C12.2@574.08,205.12 ; C13.2@520.66,208.37 575.66,208.37 578.91,205.12 651.3,205.12 U3.3@656.97,199.45
  L2 w35: v2(568,153) 591,153 658,220 ; 1326,452 1327,452 J5.1@1375,500
  L2 w60: 658,220 721,283 1215.54,283 1296,363.46 1296,422 1326,452
+5: C6.2 C11.2 J1.22 J6.2 R1.1 U3.1 | length 1238.9
  L1 w20: J6.2@375,500 378.83,496.17 395.83,496.17 519.72,372.28 576.57,372.28 584.84,380.55 U3.1@656.97,380.55 ; C6.2@537.28,851.57 537.28,888.28 550.66,901.66 550.66,949.34 J1.22@550,950 ; v1(622,500) 692.09,500 695.28,503.19 696.73,503.19 697.09,503.54 R1.1@697.09,505
  L4 w35: J6.2@375,500 498.5,500 ; J1.22@550,950 550,746.83 498.5,695.33 498.5,500 ; v1(622,500) 498.5,500
+5V_VBUS1: C3.2 D1.2 J3.A4B9 J3.B4A9 J6.1 R8.2 | length 1417.2
  L1 w12: D1.2@352.8,630 374,630 375,629
  L1 w15: J6.1@375,550 522,550 603,469 803,469 869.69,535.69 925.41,535.69 958,568.28 958,639.71 947,650.71 v1(947,653) 944.56,653 932.56,665 R8.2@897.91,665
  L1 w20: J3.A4B9@247.64,874.41 247.46,874.59 210.59,874.59 181,845 181,714 210.16,684.84 247.04,684.84 J3.B4A9@247.64,685.43 293.53,685.43 315.96,663 377.72,663 406.54,634.17 410.12,634.17 412.72,631.57 C3.2@412.72,630 ; J6.1@375,550 375,629 C3.2@411.72,629
+5V_VBUS2: C10.2 D6.2 J4.A4B9 J4.B4A9 J6.3 | length 676.9
  L1 w12: D6.2@357.8,370 C10.2@417.72,370
  L1 w15: J6.3@375,450 417.72,407.28 C10.2@417.72,370
  L1 w20: J4.B4A9@247.64,125.59 192.72,125.59 181,137.31 181,302.85 192.72,314.57 392.57,314.57 417.72,339.72 C10.2@417.72,370
BTN_GPIO0: C17.2 Q2.3 R22.1 SW2.1 SW2.2 | length 1000.7
  L1 w10: Q2.3@1127.42,810 1127.42,737.58 1203.58,661.42 SW2.2@1243.5,661.42 SW2.1@1556.5,661.42 1610.98,661.42 1621.85,672.28 C17.2@1660,672.28 1794.28,672.28 1909,787 R22.1@1972.09,787
CHIP_PU: C16.2 J2.3 Q1.3 R18.1 SW1.1 SW1.2 U1.45 | length 3469
  L1 w10: Q1.3@1127.42,665 1127.42,592.42 1210.85,509 1298.14,509 1304,503.14 1304,221.91 1269.02,186.93 1269.02,182.01 SW1.2@1248.43,161.42 ; SW1.2@1243.5,161.42 SW1.2@1248.43,161.42 ; v1(1470,477.06) 1470,318 1500.91,287.09 R18.1@1660,287.09 C16.2@1660,232.28 1634.9,232.28 1628.18,239 1580,239 1556.5,215.5 SW1.1@1556.5,161.42 SW1.2@1248.43,161.42 ; J2.3@2450,50 2503,103 2571.18,103 2586.12,117.94 2586.12,153.12 2590.12,157.12 2590.12,157.54 2600.75,168.17 2601.17,168.17 2608.17,175.17 2623.43,175.17 2629.29,181.03 U1.45@2629.29,224.41
  L4 w10: v1(1470,477.06) 1470,507 1534,571 2105.82,571 2313.82,363 2562.14,363 2594,331.14 2594,194 J2.3@2450,50
CON1_USB_N: D2.2 J3.A7 J3.B7 R4.1 | length 471.5
  L1 w6.23: J3.A7@247.64,770.08 216.92,770.08 212,775 212,805 216.45,809.45 J3.B7@247.64,809.45 248.02,809.83 330.62,809.83 D2.2@331,810.2 334.77,806.43 349.76,806.43 358.19,798 v1(363,798) ; v1(466,754) 470.81,754 479.81,745 R4.1@502.09,745
  L4 w6.23: v1(363,798) 366.65,798 375.53,789.11 397.2,789.11 453.66,732.66 474.84,732.66 492.45,750.27 492.45,760.24 488.8,763.89 478.53,763.89 468.65,754 v1(466,754)
CON1_USB_P: D3.2 J3.A6 J3.B6 R5.1 | length 493.5
  L1 w6.23: J3.B6@247.64,750.39 247.94,750.09 289.82,750.09 ; J3.A6@247.64,789.76 280.24,789.76 289.82,780.18 289.82,750.09 ; v1(363,766) 359.6,762.6 359.6,757.6 351.8,749.8 D3.2@332,749.8 331.7,750.09 289.82,750.09 ; v1(466,788) 470.81,788 477.81,795 R5.1@502.09,795
  L4 w6.23: v1(363,766) 366.65,766 375.53,774.89 391.31,774.89 447.77,718.42 480.74,718.42 506.68,744.37 506.68,766.13 494.7,778.11 478.53,778.11 468.65,788 v1(466,788)
CON2_USB_N: D7.2 J4.A7 J4.B7 R24.1 | length 1979
  L1 w6.03: D7.2@325.56,228.85 329.96,228.85 333.83,224.98 333.83,217.69 337.37,214.16 391.68,214.16 391.9,213.94 450.48,213.94 460.47,223.93 v1(463,223.93) ; v1(1877,506) 1877,507.97 1893.03,524 R24.1@1922.09,524
  L1 w6.23: J4.A7@247.64,210.24 213.65,210.24 210,213.89 210,245.96 213.65,249.61 J4.B7@247.64,249.61 283.52,249.61 304.28,228.85 D7.2@325.56,228.85
  L4 w6.03: v1(463,223.93) 465.53,223.93 475.52,213.94 653.04,213.94 916.1,477 940.45,477 970.47,446.99 1148.12,446.99 1170.12,468.98 1350.44,468.98 1365.38,454.05 1488.53,454.05 1523.15,488.66 1859.66,488.66 v1(1877,506)
CON2_USB_P: D8.2 J4.A6 J4.B6 R25.1 | length 1935.7
  L1 w6.03: J4.B6@247.64,190.55 290,190.55 290,219.71 283,226.71 279.79,229.92 J4.A6@247.64,229.92 ; 290,190.89 315.19,190.89 321.08,185 330.48,185 334.36,188.87 334.36,196.6 337.89,200.13 385.87,200.13 386.09,199.91 450.48,199.91 460.47,189.93 v1(463,189.93) ; v1(1877,457.29) 1880.18,457.29 1893.47,444 R25.1@1922.26,444
  L4 w6.03: v1(463,189.93) 465.53,189.93 475.52,199.91 658.85,199.91 921.91,462.97 934.64,462.97 964.66,432.95 1153.93,432.95 1175.93,454.95 1344.63,454.95 1359.57,440.01 1494.34,440.01 1528.96,474.63 1859.66,474.63 v1(1877,457.29)
CON_ESP_USB_N: J2.21 R26.1 | length 1774.1
  L1 w6.03: J2.21@650,50 689.45,50 692.99,53.53 692.99,71.99 779,158 v1(779,177) ; R26.1@1993.91,524 v1(2029,524)
  L4 w6.03: v1(779,177) 779,180.98 835.11,237.09 835.11,353.5 838.64,357.03 945.81,357.03 963.83,375.05 1153.76,375.05 1171.77,357.03 1458.03,357.03 1561.6,460.6 1782.4,460.6 1818.8,424.2 1869.83,424.2 1875.9,430.28 1941.12,430.28 1950.12,439.28 1988.9,439.28 1999.89,450.26 2029,479.38 v1(2029,524)